# Altium PCB BCM_ECU_revA_V3.PcbDoc (part 6 of 7)
Units mm, origin at the board's own origin, x right, y up, seen from the top; angles counter-clockwise.
Board outline 109.5 x 156 mm, 4 copper layers (TOP SIG, GND, PWR, BOT SIG), stack 0.603 mm thick; 580 components, 446 nets, 1965 pads, 870 vias.
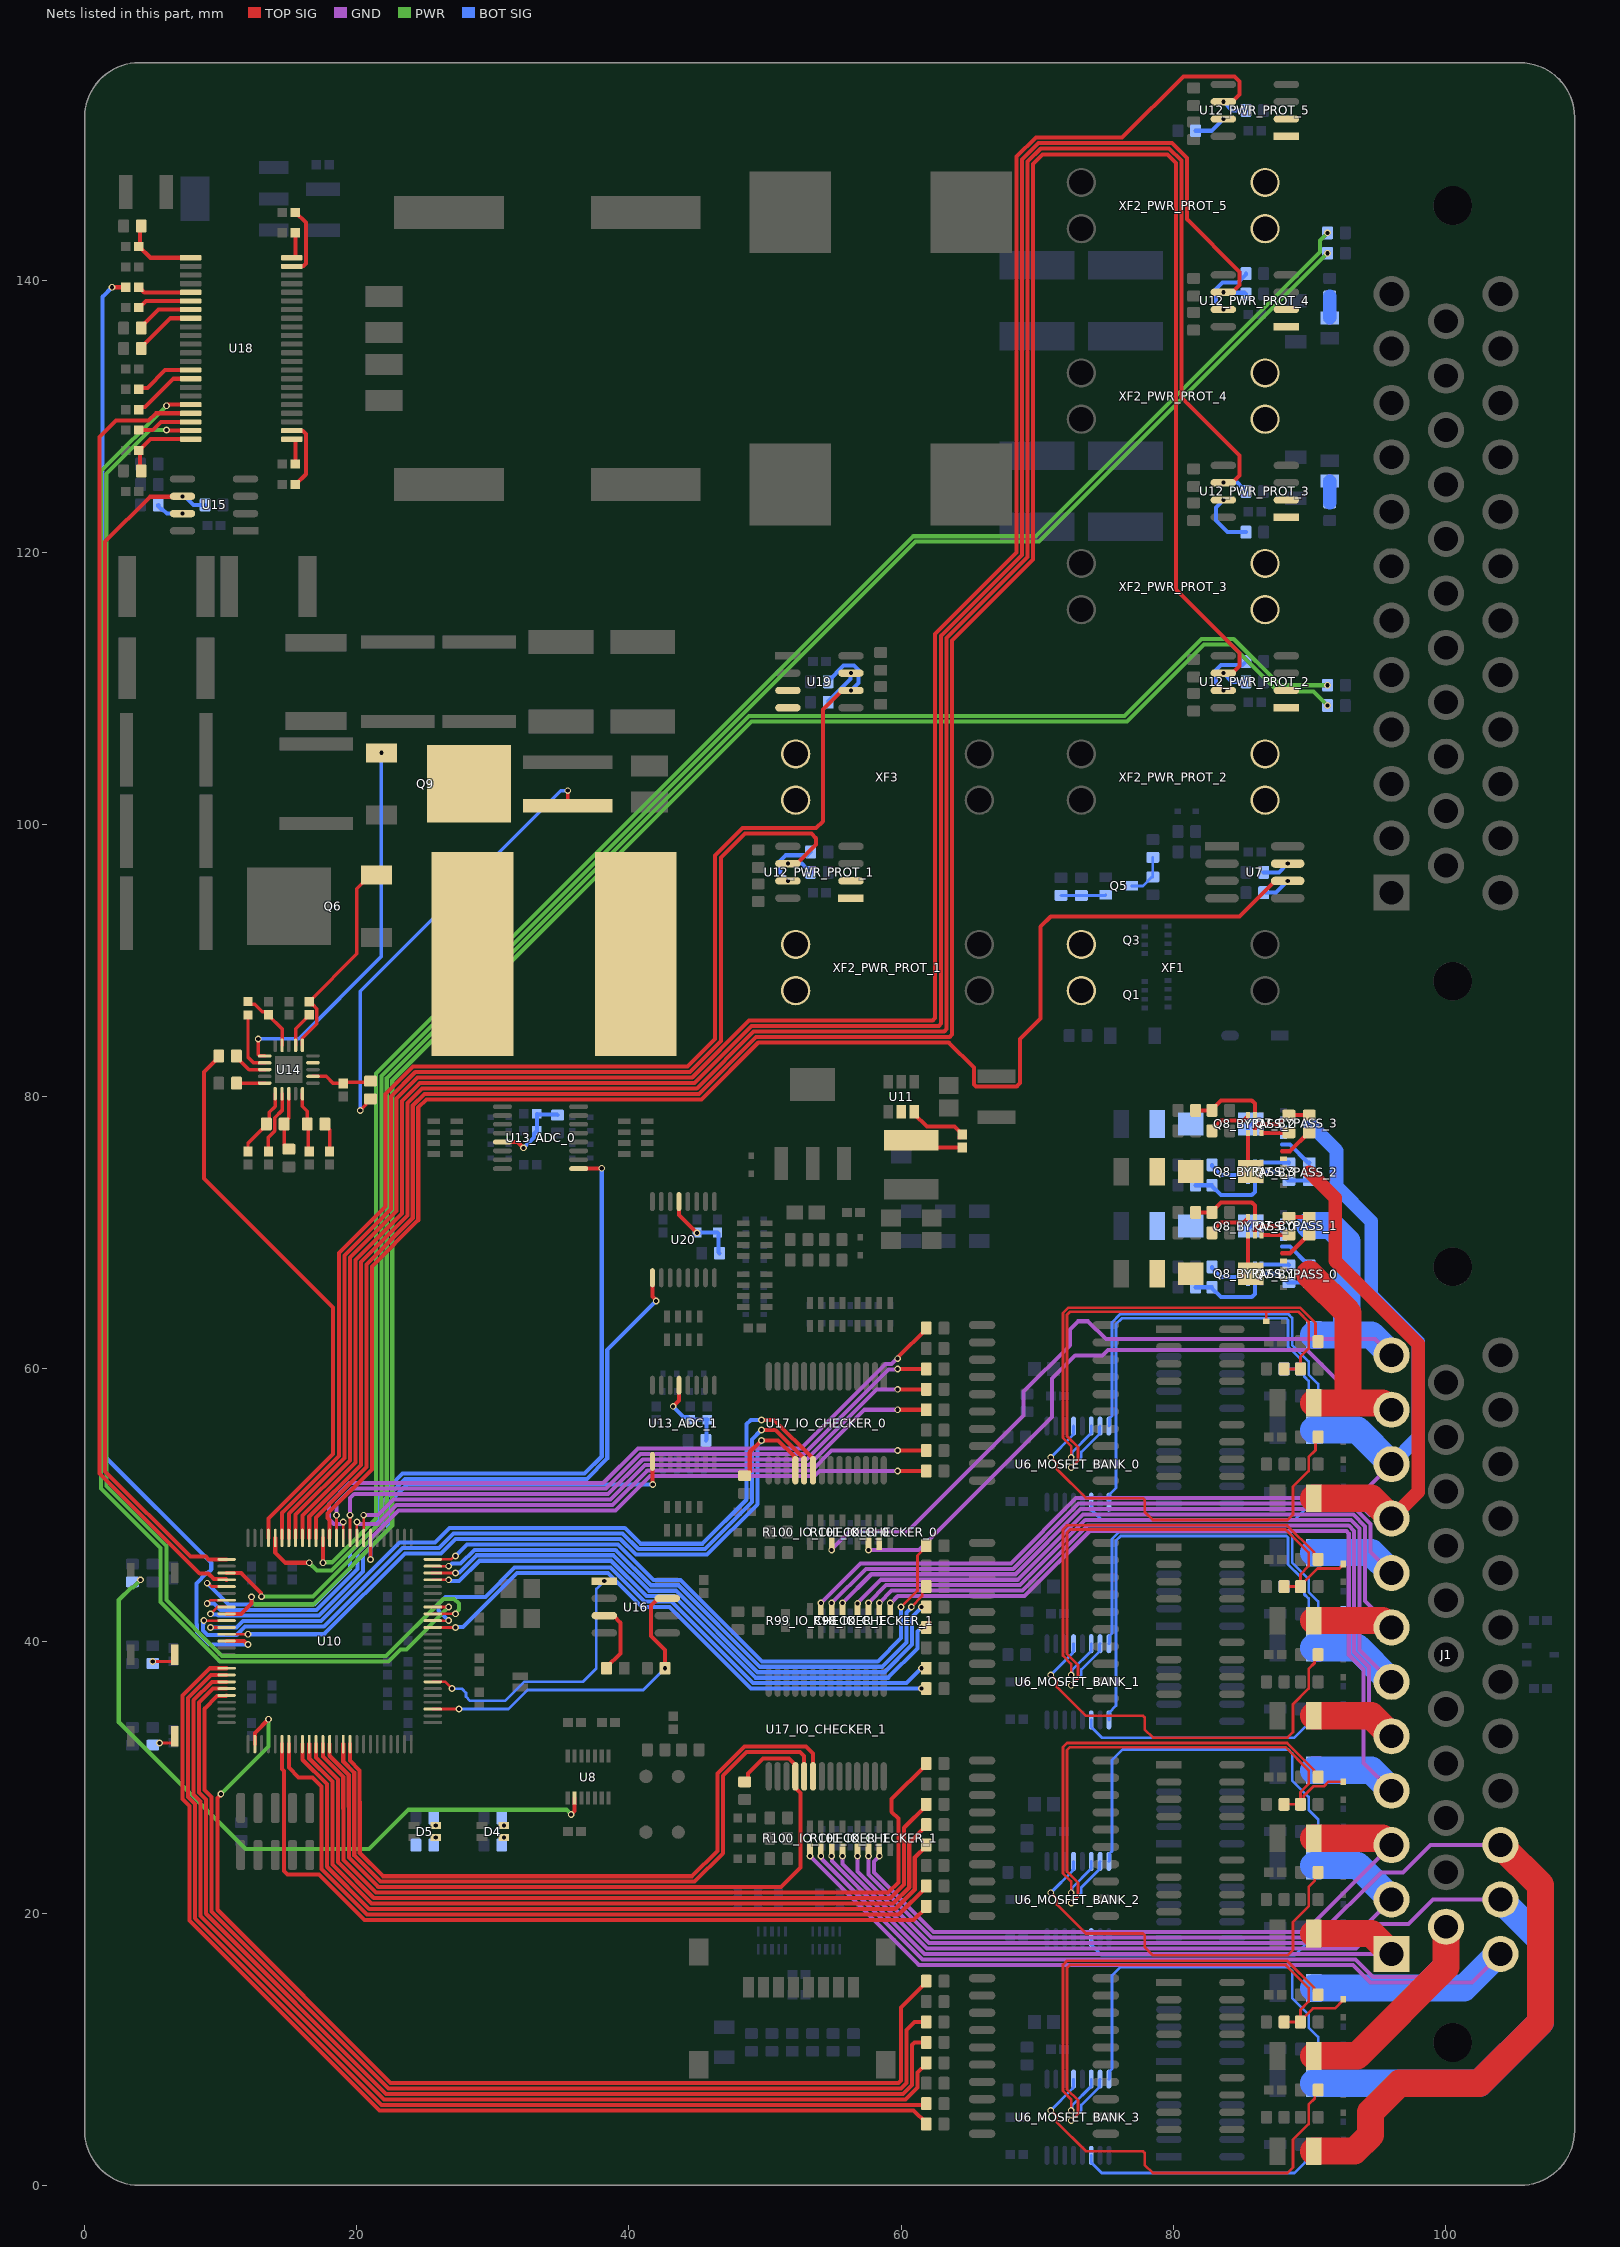
[diagram p7: the nets of this part, all layers, seen from the top]

## Via types
v1: diameter 0.5, hole 0.3, TOP SIG to BOT SIG, tented both sides, 797 vias
v2: diameter 1, hole 0.75, TOP SIG to BOT SIG, tented both sides, 56 vias
v3: diameter 4, hole 2.5, TOP SIG to BOT SIG, 9 vias
v4: diameter 0.75, hole 0.5, TOP SIG to BOT SIG, tented both sides, 6 vias
v5: diameter 2, hole 1.75, TOP SIG to BOT SIG, tented both sides, 2 vias

## Nets (pads, with @x,y where several pads share a name; then routed paths per layer and width w, separated by ;. In a path a pad name is that pad's centre, name@x,y a point inside that pad or via, vN(x,y) a via of type N, cw(c..) or ccw(c..) an arc to the next point about the centre after c; other vN are vias at no path point) (continued)
NetC42_1: C42.1 U11.6 | length 4.6
  TOP SIG w0.3: U11.6@60.95,78.901 60.95,78.751 61.899,77.802 63.927,77.802 64.292,77.436 64.314,77.436 64.5,77.25 C42.1@64.5,77.229 64.5,77.207 C42.1@64.314,77.021
NetC42_2: C42.2 L5.1 U11.5 | length 4
  TOP SIG w0.3: L5.1@60.8,76.75 L5.1@60.75,76.8 61.279,76.271 C42.2@64.5,76.271
NetC44_1: C44.1 U18.5 | length 4
  TOP SIG w0.3: C44.1@3.979,139.5 4,139.5 4.372,139.128 U18.5@7.78,139.128
NetC44_2: C44.2 U10.63 | length 109.8
  TOP SIG w0.3: v1(2,139.5) C44.2@3.021,139.5 ; U10.63@10.425,40 11.696,40 11.946,39.75 v1(12,39.75)
  BOT SIG w0.3: v1(2,139.5) 1.3,138.8 1.3,53.728 9.3,45.728 9.3,45.272 9.014,44.986 8.958,44.986 8.2,44.228 8.2,41.272 8.25,41.222 8.25,40.654 9.154,39.75 v1(12,39.75)
NetC45_1: C45.1 U18.44 | length 2.1
  TOP SIG w0.3: U18.44@15.22,141.668 15.439,141.668 15.479,141.708 C45.1@15.479,143.5
NetC50_ADC_0_1: C50_ADC_0.1 C51_ADC_0.1 R60_ADC_0.2 U13_ADC_0.13 | length 6.2
  TOP SIG w0.3: U13_ADC_0.13@30.7,76.675 31.825,76.675 v1(32.25,76.25)
  BOT SIG w0.3: v1(32.25,76.25) 33.021,77.021 33.021,77.314 33.207,77.5 C51_ADC_0.1@33.229,77.5 C50_ADC_0.1@33.229,78.75 33.279,78.7 34.7,78.7 R60_ADC_0.2@34.75,78.65
NetC50_ADC_1_1: C50_ADC_1.1 C51_ADC_1.1 R60_ADC_1.2 U13_ADC_1.13 | length 6.2
  TOP SIG w0.3: v1(43.25,57.25) 43.675,57.675 U13_ADC_1.13@43.675,58.8
  BOT SIG w0.3: v1(43.25,57.25) 44.021,56.479 44.314,56.479 44.5,56.293 C51_ADC_1.1@44.5,56.271 C50_ADC_1.1@45.75,56.271 45.7,56.221 45.7,54.8 R60_ADC_1.2@45.65,54.75
NetC52_2: C52.2 R86.2 U14.2 | length 4.5
  TOP SIG w0.254: U14.2@16.775,81.5 17.755,81.5 18.276,80.979 C52.2@19,80.979 19.086,81.064 20.914,81.064 R86.2@21,81.15
NetC63_1: C63.1 L3.2 Q6.3 Q9.4 U14.6 | length 15.5
  TOP SIG w0.254: U14.6@16,83.775 16,84.3 17.065,85.365 17.065,86.474 16.791,86.748 16.709,86.748 16.5,86.957 C63.1@16.5,86.979 16.5,87 20,90.5 20,95.295 20.991,96.286 Q6.3@21.435,96.286
NetC63_2: C63.2 U14.7 | length 2.7
  TOP SIG w0.254: U14.7@15.5,83.775 15.5,85 16.5,86 C63.2@16.5,86.021
NetC78_2: C78.2 R130.2 | length 1.6
  BOT SIG w1: C78.2@91.5,137.25 R130.2@91.5,138.85
NetC79_1: C79.1 U18.6 | length 4
  TOP SIG w0.3: C79.1@3.979,138 4,138 4.493,138.493 U18.6@7.78,138.493
NetC80_1: C80.1 U18.43 | length 5.2
  TOP SIG w0.3: U18.43@15.22,141.033 15.26,141.073 16.081,141.073 16.257,141.248 16.257,144.244 15.5,145 C80.1@15.479,145
NetC81_1: C81.1 U18.24 | length 5.2
  TOP SIG w0.3: U18.24@15.22,128.968 15.26,128.928 16.045,128.928 16.257,128.716 16.257,125.757 15.5,125 C81.1@15.479,125
NetC82_1: C82.1 U18.23 | length 2.1
  TOP SIG w0.3: U18.23@15.22,128.333 15.439,128.333 15.479,128.293 C82.1@15.479,126.5
NetC86_2: C86.2 R131.2 | length 1.6
  BOT SIG w1: R131.2@91.5,123.65 C86.2@91.5,125.25
NetC87_2: C87.2 U18.15 | length 4.7
  TOP SIG w0.3: C87.2@3.979,130.5 4.165,130.686 4.436,130.686 6.528,132.778 U18.15@7.78,132.778
NetC91_2: C91.2 R134.2 U18.1 | length 5.7
  TOP SIG w0.3: C91.2@3.979,142.5 4.064,142.586 4.064,143.914 R134.2@4.15,144 ; C91.2@4,142.5 4.833,141.668 U18.1@7.78,141.668
NetC95_2: C95.2 R135.2 U18.22 | length 5.7
  TOP SIG w0.3: C95.2@3.979,127.5 4.064,127.414 4.064,126.086 R135.2@4.15,126 ; C95.2@4,127.5 4.833,128.333 U18.22@7.78,128.333
NetC98_2: C98.2 U18.20 | length 4.1
  TOP SIG w0.3: C98.2@3.979,129 5,129 5.603,129.603 U18.20@7.78,129.603
NetC99_2: C99.2 U18.14 | length 4.4
  TOP SIG w0.3: C99.2@3.979,132 4.083,132.105 4.604,132.105 5.912,133.413 U18.14@7.78,133.413
NetC103_1: C103.1 R89.2 U14.9 | length 4.6
  TOP SIG w0.254: R89.2@12,87 12.19,86.81 12.49,86.81 13.048,86.252 13.291,86.252 13.5,86.043 C103.1@13.5,86.021 ; C103.1@13.5,86 14.5,85 U14.9@14.5,83.775
NetC105_1: C105.1 U14.17 | length 4.7
  TOP SIG w0.254: C105.1@13.5,75.979 13.5,77.01 13.979,77.489 13.979,78.468 14.5,78.99 U14.17@14.5,80.225
NetC106_1: C106.1 R90.1 U14.20 | length 4.5
  TOP SIG w0.254: U14.20@16,80.225 16,79.3 16.35,78.95 R90.1@16.35,78 16.425,77.925 16.425,76.054 C106.1@16.5,75.979
NetC107_1: C107.1 R90.2 | length 2.2
  TOP SIG w0.254: R90.2@17.65,78 17.65,77.925 18,77.575 C107.1@18,75.979
NetC108_1: C108.1 R92.1 U14.16 | length 5.1
  TOP SIG w0.254: C108.1@12,75.979 12,76.575 13.35,77.925 R92.1@13.35,78 13.568,78.218 13.568,78.856 14,79.288 U14.16@14,80.225
NetC115_1: C115.1 C116.1 R65.2 U20.13 | length 6.4
  TOP SIG w0.3: U20.13@43.675,72.8 43.675,71.325 v1(45,70)
  BOT SIG w0.3: C115.1@45,70.021 C116.1@46.5,70.021 46.575,69.946 46.575,68.575 R65.2@46.65,68.5
NetD4_1: D4.1 R43.2
  other v1: 30.8,26.45
NetD4_4: D4.4 R44.2
  other v1: 30.8,25.55
NetD5_1: D5.1 R45.2
  other v1: 25.8,26.45
NetD5_4: D5.4 R46.2
  other v1: 25.8,25.55
NetD7_BYPASS_0_1: D7_BYPASS_0.1 Q7_BYPASS_0.1 Q7_BYPASS_0.2 Q7_BYPASS_0.3 Q8_BYPASS_0.4 R54_BYPASS_0.1 | length 5.5
  TOP SIG w0.3: Q8_BYPASS_0.4@85.5,69.825 85.5,67.21 D7_BYPASS_0.1@85.71,67 ; 88,68.5 88.575,68.5 89.925,69.85 R54_BYPASS_0.1@90,69.85
NetD7_BYPASS_0_2: D7_BYPASS_0.2 F6_BYPASS_0.2
NetD7_BYPASS_1_1: D7_BYPASS_1.1 Q7_BYPASS_1.1 Q7_BYPASS_1.2 Q7_BYPASS_1.3 Q8_BYPASS_1.4 R54_BYPASS_1.1 | length 5.5
  BOT SIG w0.3: Q8_BYPASS_1.4@85.5,67.675 85.5,70.29 D7_BYPASS_1.1@85.71,70.5 ; 88,69 88.575,69 89.925,67.65 R54_BYPASS_1.1@90,67.65
NetD7_BYPASS_1_2: D7_BYPASS_1.2 F6_BYPASS_1.2
NetD7_BYPASS_2_1: D7_BYPASS_2.1 Q7_BYPASS_2.1 Q7_BYPASS_2.2 Q7_BYPASS_2.3 Q8_BYPASS_2.4 R54_BYPASS_2.1 | length 5.5
  TOP SIG w0.3: Q8_BYPASS_2.4@85.5,77.325 85.5,74.71 D7_BYPASS_2.1@85.71,74.5 ; 88,76 88.575,76 89.925,77.35 R54_BYPASS_2.1@90,77.35
NetD7_BYPASS_2_2: D7_BYPASS_2.2 F6_BYPASS_2.2
NetD7_BYPASS_3_1: D7_BYPASS_3.1 Q7_BYPASS_3.1 Q7_BYPASS_3.2 Q7_BYPASS_3.3 Q8_BYPASS_3.4 R54_BYPASS_3.1 | length 5.5
  BOT SIG w0.3: Q8_BYPASS_3.4@85.5,75.175 85.5,77.79 D7_BYPASS_3.1@85.71,78 ; 88,76.5 88.575,76.5 89.925,75.15 R54_BYPASS_3.1@90,75.15
NetD7_BYPASS_3_2: D7_BYPASS_3.2 F6_BYPASS_3.2
NetL3_1: L3.1 R85.2 R86.1 | length 32.4
  TOP SIG w0.254: v1(20.25,79) 20.652,79.402 20.652,79.577 20.925,79.85 R86.1@21,79.85 ; R85.2@35.5,101.4 v1(35.5,102.5)
  BOT SIG w0.254: v1(20.25,79) 20.25,87.75 35,102.5 v1(35.5,102.5)
NetQ1_5-6-7-8: Q1.5-6-7-8 Q3.5-6-7-8 XF1.3 XF1.4
NetQ5_1: Q5.1 R30.2 R32.2 | length 3.3
  BOT SIG w0.2: R30.2@71.75,94.8 R32.2@73.25,94.8 75,94.8 Q5.1@75.05,94.85
NetQ5_3: Q5.3 R28.1 R69.1 | length 3.3
  BOT SIG w0.2: Q5.3@76.95,95.5 77.775,95.5 78.425,96.15 R28.1@78.5,96.15 R69.1@78.5,97.6
NetQ8_BYPASS_0_2: Q8_BYPASS_0.2 R58_BYPASS_0.1 R59_BYPASS_0.2 | length 5.6
  TOP SIG w0.3: R59_BYPASS_0.2@81.65,71.5 R58_BYPASS_0.1@82.85,71.5 82.85,71.575 83.502,72.227 85.773,72.227 86,72 Q8_BYPASS_0.2@86,71.175
NetQ8_BYPASS_0_3: Q8_BYPASS_0.3 R56_BYPASS_0.1 | length 3.2
  TOP SIG w0.3: R56_BYPASS_0.1@82.85,70 82.85,70.075 83.524,70.749 85.149,70.749 85.5,71.1 Q8_BYPASS_0.3@85.5,71.175
NetQ8_BYPASS_0_5: Q8_BYPASS_0.5 R54_BYPASS_0.2 R55_BYPASS_0.1 | length 4.8
  TOP SIG w0.3: Q8_BYPASS_0.5@86,69.825 86,70.324 86.176,70.5 87.775,70.5 88.175,70.9 R55_BYPASS_0.1@88.425,71.15 ; R55_BYPASS_0.1@88.5,71.15 R54_BYPASS_0.2@90,71.15
NetQ8_BYPASS_1_2: Q8_BYPASS_1.2 R58_BYPASS_1.1 R59_BYPASS_1.2 | length 5.6
  BOT SIG w0.3: R59_BYPASS_1.2@81.65,66 R58_BYPASS_1.1@82.85,66 82.85,65.925 83.502,65.274 85.773,65.274 86,65.5 Q8_BYPASS_1.2@86,66.325
NetQ8_BYPASS_1_3: Q8_BYPASS_1.3 R56_BYPASS_1.1 | length 3.2
  BOT SIG w0.3: R56_BYPASS_1.1@82.85,67.5 82.85,67.425 83.524,66.751 85.149,66.751 85.5,66.4 Q8_BYPASS_1.3@85.5,66.325
NetQ8_BYPASS_1_5: Q8_BYPASS_1.5 R54_BYPASS_1.2 R55_BYPASS_1.1 | length 4.8
  BOT SIG w0.3: Q8_BYPASS_1.5@86,67.675 86,67.176 86.176,67 87.775,67 88.175,66.6 R55_BYPASS_1.1@88.425,66.35 ; R55_BYPASS_1.1@88.5,66.35 R54_BYPASS_1.2@90,66.35
NetQ8_BYPASS_2_2: Q8_BYPASS_2.2 R58_BYPASS_2.1 R59_BYPASS_2.2 | length 5.6
  TOP SIG w0.3: R59_BYPASS_2.2@81.65,79 R58_BYPASS_2.1@82.85,79 82.85,79.075 83.502,79.727 85.773,79.727 86,79.5 Q8_BYPASS_2.2@86,78.675
NetQ8_BYPASS_2_3: Q8_BYPASS_2.3 R56_BYPASS_2.1 | length 3.2
  TOP SIG w0.3: R56_BYPASS_2.1@82.85,77.5 82.85,77.575 83.524,78.249 85.149,78.249 85.5,78.6 Q8_BYPASS_2.3@85.5,78.675
NetQ8_BYPASS_2_5: Q8_BYPASS_2.5 R54_BYPASS_2.2 R55_BYPASS_2.1 | length 4.8
  TOP SIG w0.3: Q8_BYPASS_2.5@86,77.325 86,77.824 86.176,78 87.775,78 88.175,78.4 R55_BYPASS_2.1@88.425,78.65 ; R55_BYPASS_2.1@88.5,78.65 R54_BYPASS_2.2@90,78.65
NetQ8_BYPASS_3_2: Q8_BYPASS_3.2 R58_BYPASS_3.1 R59_BYPASS_3.2 | length 5.6
  BOT SIG w0.3: R59_BYPASS_3.2@81.65,73.5 R58_BYPASS_3.1@82.85,73.5 82.85,73.425 83.502,72.774 85.773,72.774 86,73 Q8_BYPASS_3.2@86,73.825
NetQ8_BYPASS_3_3: Q8_BYPASS_3.3 R56_BYPASS_3.1 | length 3.2
  BOT SIG w0.3: R56_BYPASS_3.1@82.85,75 82.85,74.925 83.524,74.251 85.149,74.251 85.5,73.9 Q8_BYPASS_3.3@85.5,73.825
NetQ8_BYPASS_3_5: Q8_BYPASS_3.5 R54_BYPASS_3.2 R55_BYPASS_3.1 | length 4.8
  BOT SIG w0.3: Q8_BYPASS_3.5@86,75.175 86,74.676 86.176,74.5 87.775,74.5 88.175,74.1 R55_BYPASS_3.1@88.425,73.85 ; R55_BYPASS_3.1@88.5,73.85 R54_BYPASS_3.2@90,73.85
NetQ9_1: Q9.1 U14.11 | length 28.2
  TOP SIG w0.254: v1(12.75,84.25) 12.75,83.104 12.854,83 U14.11@13.225,83
  BOT SIG w0.254: v1(12.75,84.25) 15.744,84.25 21.809,90.315 v1(21.809,105.286)
NetR1_MOSFET_BANK_0_1: R1_MOSFET_BANK_0.1 U10.36 | length 52.9
  TOP SIG w0.2: U10.36@19,47.575 v1(19,48.75)
  TOP SIG w0.3: v1(59.75,60.75) 59.788,60.788 59.788,60.863 61.85,62.925 R1_MOSFET_BANK_0.1@61.85,63
  GND w0.3: v1(19,48.75) 18.946,48.75 18.796,48.6 18.3,48.6 17.95,48.95 17.95,50.086 19.474,51.61 38.11,51.61 40.652,54.152 52.652,54.152 58.863,60.363 59.309,60.363 59.696,60.75 v1(59.75,60.75)
NetR1_MOSFET_BANK_1_1: R1_MOSFET_BANK_1.1 U10.25 | length 46.7
  TOP SIG w0.2: U10.25@25.576,46 26.919,46 27.169,46.25 v1(27.25,46.25) ; v1(60,42.5) 61.2,43.7 61.2,46.275 61.85,46.925 R1_MOSFET_BANK_1.1@61.85,47
  BOT SIG w0.3: v1(27.25,46.25) 28.105,47.105 39.191,47.105 41.796,44.5 43.8,44.5 49.792,38.508 58.286,38.508 59.995,40.218 59.995,42.495 v1(60,42.5)
NetR1_MOSFET_BANK_2_1: R1_MOSFET_BANK_2.1 U10.87 | length 61.2
  TOP SIG w0.3: U10.87@17.5,32.425 17.5,31.5 19.002,29.998 19.002,27.67 19.006,27.665 19.006,23.908 21.407,21.508 59.04,21.508 59.798,22.266 59.798,26.952 59.3,27.45 59.3,28.375 61.85,30.925 R1_MOSFET_BANK_2.1@61.85,31
NetR1_MOSFET_BANK_3_1: R1_MOSFET_BANK_3.1 U10.77 | length 81.5
  TOP SIG w0.3: v1(10,28.75) 10,28.724 9.75,28.474 9.75,20.25 22.487,7.513 59.813,7.513 59.994,7.694 59.994,8.52 60,8.526 60,13.075 61.85,14.925 R1_MOSFET_BANK_3.1@61.85,15 ; U10.77@12.5,32.425 12.5,33.25 v1(13.5,34.25)
  PWR w0.3: v1(10,28.75) 13.5,32.25 v1(13.5,34.25)
NetR2_MOSFET_BANK_0_1: R2_MOSFET_BANK_0.1 U10.35 | length 48.6
  TOP SIG w0.2: U10.35@19.5,47.575 19.5,48.543 v1(19.5,49.25)
  TOP SIG w0.3: v1(59.75,58.5) R2_MOSFET_BANK_0.1@61.85,58.5
  GND w0.3: v1(19.5,49.25) 19.5,50.5 19.806,50.806 38.471,50.806 41.013,53.348 53.048,53.348 58.2,58.5 v1(59.75,58.5)
NetR2_MOSFET_BANK_1_1: R2_MOSFET_BANK_1.1 U10.23 | length 43.3
  TOP SIG w0.2: U10.23@25.5,45 U10.23@25.576,45 v1(27.25,45)
  BOT SIG w0.3: v1(27.25,45) 27.288,45.038 27.538,45.038 28.802,46.302 38.859,46.302 41.463,43.697 43.467,43.697 49.459,37.705 58.773,37.705 60.798,39.73 60.798,41.771 61.5,42.472 v1(61.5,42.5)
NetR2_MOSFET_BANK_2_1: R2_MOSFET_BANK_2.1 U10.85 | length 58.8
  TOP SIG w0.3: U10.85@16.5,32.425 16.5,31.364 18.198,29.666 18.198,27.337 18.203,27.333 18.203,26.501 18.203,25.571 18.203,24.571 18.203,23.576 21.074,20.705 22.07,20.705 23.07,20.705 23.999,20.705 59.405,20.705 60.602,21.902 60.602,25.177 61.85,26.425 R2_MOSFET_BANK_2.1@61.85,26.5
NetR2_MOSFET_BANK_3_1: R2_MOSFET_BANK_3.1 U10.70 | length 79.9
  TOP SIG w0.3: U10.70@10.425,36.5 9.414,36.5 8.397,35.483 8.397,28.878 8.91,28.365 8.91,19.955 22.155,6.71 60.145,6.71 60.797,7.361 60.797,8.187 60.803,8.193 60.803,10.324 60.979,10.5 R2_MOSFET_BANK_3.1@61.85,10.5
NetR3_MOSFET_BANK_0_1: R3_MOSFET_BANK_0.1 U10.33 | length 46.2
  TOP SIG w0.2: U10.33@20.5,47.575 v1(20.5,49.25)
  TOP SIG w0.3: v1(59.75,57) R3_MOSFET_BANK_0.1@61.85,57
  GND w0.3: v1(20.5,49.25) 21.55,49.25 22.705,50.405 38.637,50.405 41.179,52.947 53.247,52.947 57.3,57 v1(59.75,57)
NetR3_MOSFET_BANK_1_1: R3_MOSFET_BANK_1.1 U10.22 | length 42.4
  TOP SIG w0.2: U10.22@25.576,44.5 v1(26.75,44.5)
  BOT SIG w0.3: v1(26.75,44.5) 26.804,44.5 26.904,44.4 27.5,44.4 29,45.9 38.692,45.9 41.297,43.295 43.301,43.295 49.293,37.303 59.053,37.303 61.2,39.45 61.2,40.7 v1(61.5,41)
NetR3_MOSFET_BANK_2_1: R3_MOSFET_BANK_2.1 U10.84 | length 58.5
  TOP SIG w0.3: U10.84@16,32.425 16,31.275 17.797,29.478 17.797,27.171 17.802,27.166 17.802,26.334 17.802,25.405 17.802,24.405 17.802,23.409 20.908,20.303 21.903,20.303 22.903,20.303 23.833,20.303 59.571,20.303 61.003,21.735 61.003,24.078 61.85,24.925 R3_MOSFET_BANK_2.1@61.85,25
NetR3_MOSFET_BANK_3_1: R3_MOSFET_BANK_3.1 U10.69 | length 79.8
  TOP SIG w0.3: U10.69@10.425,37 9.346,37 7.995,35.649 7.995,28.712 8.508,28.199 8.508,19.788 21.988,6.308 60.312,6.308 61.198,7.195 61.198,8.021 61.205,8.027 61.205,8.28 61.85,8.925 R3_MOSFET_BANK_3.1@61.85,9
NetR4_MOSFET_BANK_0_1: R4_MOSFET_BANK_0.1 U10.32 | length 46
  TOP SIG w0.2: v1(21,46) U10.32@21,47.575
  TOP SIG w0.3: v1(59.75,52.5) R4_MOSFET_BANK_0.1@61.85,52.5
  GND w0.3: v1(21,46) 21,47.528 23.074,49.602 39.002,49.602 41.544,52.144 53.644,52.144 54,52.5 v1(59.75,52.5)
NetR4_MOSFET_BANK_1_1: R4_MOSFET_BANK_1.1 U10.15 | length 41.1
  TOP SIG w0.2: U10.15@25.576,41 v1(27.25,41)
  BOT SIG w0.3: v1(27.25,41) 27.288,41.038 27.806,41.038 31.755,44.987 38.469,44.987 40.964,42.492 42.968,42.492 48.962,36.498 60.566,36.498 60.568,36.5 v1(61.5,36.5)
NetR4_MOSFET_BANK_2_1: R4_MOSFET_BANK_2.1 U10.81 | length 58.5
  TOP SIG w0.3: U10.81@14.5,32.425 14.5,30.6 14.65,30.45 14.65,23.1 14.9,22.85 17.225,22.85 20.575,19.5 60.925,19.5 61.85,20.425 R4_MOSFET_BANK_2.1@61.85,20.5
NetR4_MOSFET_BANK_3_1: R4_MOSFET_BANK_3.1 U10.67 | length 81.2
  TOP SIG w0.3: U10.67@10.425,38 9.21,38 7.192,35.982 7.192,28.379 7.705,27.866 7.705,19.455 21.655,5.505 60.92,5.505 61.85,4.575 R4_MOSFET_BANK_3.1@61.85,4.5
NetR5_MOSFET_BANK_0_1: R5_MOSFET_BANK_0.1 U10.37 | length 50
  TOP SIG w0.2: U10.37@18.5,47.575 18.5,48.543 18.5,49.24 v1(18.505,49.245)
  TOP SIG w0.3: v1(59.75,60) R5_MOSFET_BANK_0.1@61.85,60
  GND w0.3: v1(18.505,49.245) 18.505,50.073 19.64,51.208 38.304,51.208 40.846,53.75 52.85,53.75 59.062,59.962 59.712,59.962 v1(59.75,60)
NetR5_MOSFET_BANK_1_1: R5_MOSFET_BANK_1.1 U10.24 | length 44.3
  TOP SIG w0.2: U10.24@25.576,45.5 v1(26.75,45.5) ; v1(60.75,42.5) 60.75,42.507 61.55,43.307 61.55,43.7 R5_MOSFET_BANK_1.1@61.85,44
  BOT SIG w0.3: v1(26.75,45.5) 26.804,45.5 27.004,45.7 27.632,45.7 28.635,46.703 39.025,46.703 41.63,44.098 43.634,44.098 49.626,38.106 58.606,38.106 60.397,39.897 60.397,42.093 60.75,42.446 v1(60.75,42.5)
NetR5_MOSFET_BANK_2_1: R5_MOSFET_BANK_2.1 U10.86 | length 59
  TOP SIG w0.3: U10.86@17,32.425 17,31.432 18.6,29.832 18.6,27.504 18.605,27.499 18.605,26.667 18.605,25.738 18.605,24.738 18.605,23.742 21.24,21.106 22.236,21.106 23.236,21.106 24.165,21.106 59.206,21.106 60.2,22.1 60.2,26.275 61.85,27.925 R5_MOSFET_BANK_2.1@61.85,28
NetR5_MOSFET_BANK_3_1: R5_MOSFET_BANK_3.1 U10.71 | length 79.4
  TOP SIG w0.3: U10.71@10.425,36 10.381,35.956 9.736,35.956 8.798,35.019 8.798,29.044 9.311,28.531 9.311,20.121 22.321,7.111 59.979,7.111 60.395,7.527 60.395,8.353 60.402,8.36 60.402,11.402 61,12 R5_MOSFET_BANK_3.1@61.85,12
NetR6_MOSFET_BANK_0_1: R6_MOSFET_BANK_0.1 U10.34 | length 45.3
  TOP SIG w0.2: U10.34@20,47.575 v1(20,48.75)
  TOP SIG w0.3: v1(59.75,54) R6_MOSFET_BANK_0.1@61.85,54
  GND w0.3: v1(20,48.75) 20.054,48.75 20.204,48.6 21.5,48.6 22.903,50.003 38.803,50.003 41.345,52.545 53.445,52.545 54.9,54 v1(59.75,54)
NetR6_MOSFET_BANK_1_1: R6_MOSFET_BANK_1.1 U10.16 | length 43.4
  TOP SIG w0.2: U10.16@25.5,41.5 U10.16@25.576,41.5 v1(26.75,41.5)
  BOT SIG w0.3: v1(26.75,41.5) 26,42.25 26,42.75 26.5,43.25 29.45,43.25 31.589,45.389 38.636,45.389 41.131,42.894 43.135,42.894 49.128,36.9 60.4,36.9 v1(61.5,38)
NetR6_MOSFET_BANK_2_1: R6_MOSFET_BANK_2.1 U10.82 | length 57.5
  TOP SIG w0.3: U10.82@15,32.425 15,30.7 15.725,29.975 16.732,29.975 17.395,29.312 17.395,27.005 17.4,27 17.4,26.168 17.4,25.238 17.4,24.238 17.4,23.243 20.741,19.902 21.737,19.902 22.737,19.902 23.666,19.902 59.827,19.902 61.85,21.925 R6_MOSFET_BANK_2.1@61.85,22
NetR6_MOSFET_BANK_3_1: R6_MOSFET_BANK_3.1 U10.68 | length 79.4
  TOP SIG w0.3: U10.68@10.425,37.5 9.278,37.5 7.594,35.815 7.594,28.545 8.106,28.032 8.106,19.622 21.822,5.906 61.756,5.906 R6_MOSFET_BANK_3.1@61.85,6
NetR9_2: R9.2 U10.59 | length 132.4
  TOP SIG w0.3: U10.59@10.425,42 11.5,42 12.25,42.75 v1(12.25,43.25)
  PWR w0.3: v1(12.25,43.25) 12.288,43.212 12.288,42.876 12.464,42.7 16.8,42.7 22.6,48.5 22.6,81.2 48.998,107.598 76.598,107.598 82.25,113.25 84.25,113.25 87.7,109.8 90.3,109.8 v1(91.35,108.75)
NetR10_2: R10.2 U10.53 | length 131.5
  TOP SIG w0.3: U10.53@10.425,45 11.5,45 12.962,43.538 12.962,43.296 v1(13,43.258)
  PWR w0.3: v1(13,43.258) 16.79,43.258 22.198,48.666 22.198,81.366 48.832,108 76.432,108 82.084,113.652 84.448,113.652 87.85,110.25 v1(91.35,110.25)
NetR13_MOSFET_BANK_0_1: R13_MOSFET_BANK_0.1 U6_MOSFET_BANK_0.11 | length 18.6
  BOT SIG w0.2: U6_MOSFET_BANK_0.11@73.975,50.2 73.975,49.675 74.75,48.9 88.9,48.9 90.35,50.35 90.35,50.7 R13_MOSFET_BANK_0.1@90.65,51
NetR13_MOSFET_BANK_1_1: R13_MOSFET_BANK_1.1 U6_MOSFET_BANK_1.11 | length 18.6
  BOT SIG w0.2: U6_MOSFET_BANK_1.11@73.975,34.2 73.975,33.675 74.75,32.9 88.9,32.9 90.35,34.35 90.35,34.7 R13_MOSFET_BANK_1.1@90.65,35
NetR13_MOSFET_BANK_2_1: R13_MOSFET_BANK_2.1 U6_MOSFET_BANK_2.11 | length 18.6
  BOT SIG w0.2: U6_MOSFET_BANK_2.11@73.975,18.2 73.975,17.675 74.75,16.9 88.9,16.9 90.35,18.35 90.35,18.7 R13_MOSFET_BANK_2.1@90.65,19
NetR13_MOSFET_BANK_3_1: R13_MOSFET_BANK_3.1 U6_MOSFET_BANK_3.11 | length 18.6
  BOT SIG w0.2: U6_MOSFET_BANK_3.11@73.975,2.2 73.975,1.675 74.75,0.9 88.9,0.9 90.35,2.35 90.35,2.7 R13_MOSFET_BANK_3.1@90.65,3
NetR14_MOSFET_BANK_0_1: R14_MOSFET_BANK_0.1 U6_MOSFET_BANK_0.4 | length 30.1
  TOP SIG w0.2: v1(71,53.5) 71.448,53.052 71.448,52.625 73.575,50.499 77.781,50.499 77.898,50.381 77.898,49.502 78.5,48.9 88.4,48.9 88.802,49.302 88.802,51.35 89.952,52.5 89.952,53.525 90.45,54.023 90.45,54.8 R14_MOSFET_BANK_0.1@90.65,55
  BOT SIG w0.2: v1(71,53.5) 72.6,55.1 72.6,55.16 72.675,55.235 U6_MOSFET_BANK_0.4@72.675,55.8
NetR14_MOSFET_BANK_1_1: R14_MOSFET_BANK_1.1 U6_MOSFET_BANK_1.4 | length 30.1
  TOP SIG w0.2: v1(71,37.5) 71.448,37.052 71.448,36.625 73.575,34.499 77.781,34.499 77.898,34.381 77.898,33.502 78.5,32.9 88.4,32.9 88.802,33.302 88.802,35.35 89.952,36.5 89.952,37.952 90.405,38.405 90.405,38.755 R14_MOSFET_BANK_1.1@90.65,39
  BOT SIG w0.2: v1(71,37.5) 72.6,39.1 72.6,39.16 72.675,39.235 U6_MOSFET_BANK_1.4@72.675,39.8
NetR14_MOSFET_BANK_2_1: R14_MOSFET_BANK_2.1 U6_MOSFET_BANK_2.4 | length 30.1
  TOP SIG w0.2: v1(71,21.5) 71.448,21.052 71.448,20.625 73.575,18.499 77.781,18.499 77.898,18.381 77.898,17.502 78.5,16.9 88.4,16.9 88.802,17.302 88.802,19.35 89.952,20.5 89.952,21.936 90.413,22.397 90.413,22.763 R14_MOSFET_BANK_2.1@90.65,23
  BOT SIG w0.2: v1(71,21.5) 72.6,23.1 72.6,23.16 72.675,23.235 U6_MOSFET_BANK_2.4@72.675,23.8
NetR14_MOSFET_BANK_3_1: R14_MOSFET_BANK_3.1 U6_MOSFET_BANK_3.4 | length 30.1
  TOP SIG w0.2: v1(71,5.5) 71.448,5.052 71.448,4.625 73.575,2.499 77.781,2.499 77.898,2.381 77.898,1.502 78.5,0.9 88.4,0.9 88.802,1.302 88.802,3.35 89.952,4.5 89.952,5.936 90.413,6.397 90.413,6.763 R14_MOSFET_BANK_3.1@90.65,7
  BOT SIG w0.2: v1(71,5.5) 72.6,7.1 72.6,7.16 72.675,7.235 U6_MOSFET_BANK_3.4@72.675,7.8
NetR15_MOSFET_BANK_0_1: R15_MOSFET_BANK_0.1 U6_MOSFET_BANK_0.8 | length 27.9
  BOT SIG w0.2: U6_MOSFET_BANK_0.8@75.275,55.8 75.324,55.849 75.324,56.374 75.5,56.55 75.5,60.5 75.5,61.177 75.5,63.427 76.093,64.019 78.343,64.019 79.019,64.019 88.466,64.019 88.741,63.744 88.741,61.759 89.952,60.549 89.952,59.597 90.65,58.899 R15_MOSFET_BANK_0.1@90.65,58
NetR15_MOSFET_BANK_1_1: R15_MOSFET_BANK_1.1 U6_MOSFET_BANK_1.8 | length 27.9
  BOT SIG w0.2: U6_MOSFET_BANK_1.8@75.275,39.8 75.324,39.849 75.324,40.374 75.5,40.55 75.5,47.5 76.019,48.019 88.466,48.019 88.741,47.744 88.741,45.759 89.952,44.549 89.952,43.597 90.65,42.899 R15_MOSFET_BANK_1.1@90.65,42
NetR15_MOSFET_BANK_2_1: R15_MOSFET_BANK_2.1 U6_MOSFET_BANK_2.8 | length 27.8
  BOT SIG w0.2: U6_MOSFET_BANK_2.8@75.275,23.8 75.324,23.849 75.324,24.374 75.5,24.55 75.5,31.25 76.269,32.019 88.466,32.019 88.741,31.744 88.741,29.759 89.952,28.549 89.952,27.597 90.65,26.899 R15_MOSFET_BANK_2.1@90.65,26
NetR15_MOSFET_BANK_3_1: R15_MOSFET_BANK_3.1 U6_MOSFET_BANK_3.8 | length 27.9
  BOT SIG w0.2: U6_MOSFET_BANK_3.8@75.275,7.8 75.324,7.849 75.324,8.374 75.5,8.55 75.5,15.25 75.5,15.427 76.093,16.019 76.269,16.019 88.466,16.019 88.741,15.744 88.741,13.759 89.952,12.549 89.952,11.597 90.65,10.899 R15_MOSFET_BANK_3.1@90.65,10
NetR17_MOSFET_BANK_0_1: R17_MOSFET_BANK_0.1 U6_MOSFET_BANK_0.6 | length 34.4
  TOP SIG w0.2: v1(72.5,53.5) 72.5,54.324 71.9,54.924 71.9,64.106 72.294,64.5 89.326,64.5 90.45,63.377 90.45,62.2 R17_MOSFET_BANK_0.1@90.65,62
  BOT SIG w0.2: v1(72.5,53.5) 72.557,53.558 72.557,53.858 73.975,55.275 U6_MOSFET_BANK_0.6@73.975,55.8
NetR17_MOSFET_BANK_1_1: R17_MOSFET_BANK_1.1 U6_MOSFET_BANK_1.6 | length 33.9
  TOP SIG w0.2: v1(72.5,37.5) 72.5,38.324 71.9,38.924 71.9,48.2 72.2,48.5 88.378,48.5 90.35,46.528 90.35,46.3 R17_MOSFET_BANK_1.1@90.65,46
  BOT SIG w0.2: v1(72.5,37.5) 72.557,37.558 72.557,37.858 73.975,39.275 U6_MOSFET_BANK_1.6@73.975,39.8
NetR17_MOSFET_BANK_2_1: R17_MOSFET_BANK_2.1 U6_MOSFET_BANK_2.6 | length 33.9
  TOP SIG w0.2: v1(72.5,21.5) 72.5,22.324 71.9,22.924 71.9,32.2 72.2,32.5 88.378,32.5 90.35,30.528 90.35,30.3 R17_MOSFET_BANK_2.1@90.65,30
  BOT SIG w0.2: v1(72.5,21.5) 72.557,21.558 72.557,21.858 73.975,23.275 U6_MOSFET_BANK_2.6@73.975,23.8
NetR17_MOSFET_BANK_3_1: R17_MOSFET_BANK_3.1 U6_MOSFET_BANK_3.6 | length 33.9
  TOP SIG w0.2: v1(72.5,5.5) 72.5,6.324 71.9,6.924 71.9,16.2 72.2,16.5 88.378,16.5 90.35,14.528 90.35,14.3 R17_MOSFET_BANK_3.1@90.65,14
  BOT SIG w0.2: v1(72.5,5.5) 72.557,5.558 72.557,5.858 73.975,7.275 U6_MOSFET_BANK_3.6@73.975,7.8
NetR26_1: R26.1 U7.6 U10.38 | length 116.7
  TOP SIG w0.3: U10.38@18,47.575 18,48.9 17.85,49.05 17.85,49.367 21.099,52.616 21.099,67.516 24.51,70.928 24.51,79.202 25.123,79.815 45.315,79.815 49.5,84 63.5,84 65.351,82.149 65.351,80.899 65.502,80.748 68.498,80.748 68.75,81 68.75,84.25 70.25,85.75 70.25,92.5 71,93.25 84.875,93.25 87.49,95.865 v1(88.416,95.865)
  BOT SIG w0.3: R26.1@86.65,95 87.551,95 v1(88.416,95.865)
NetR34_1: R34.1 U8.9 | length 51
  TOP SIG w0.3: v1(35.75,27.25) 35.75,27.268 36,27.518 U8.9@36,28.457
  PWR w0.3: v1(4.1,44.5) 3.549,43.949 3.449,43.949 2.5,43 2.5,34.032 11.832,24.7 20.9,24.7 23.8,27.6 35.4,27.6 v1(35.75,27.25)
NetR36_1: R36.1 U10.3 U16.7 | length 24.8
  TOP SIG w0.2: U10.3@25.576,35 v1(27.5,35)
  TOP SIG w0.3: v1(42.65,38) 42.65,39.355 41.627,40.378 41.627,42.611 42.151,43.135 U16.7@42.816,43.135
  BOT SIG w0.2: v1(27.5,35) 27.502,34.998 31.147,34.998 32.545,36.397 41.047,36.397 v1(42.65,38)
NetR39_2: R39.2 SW2.1 | length 2
  TOP SIG w0.2: v1(5,38.5) 6.45,38.5 6.5,38.55 SW2.1@6.5,39
NetR40_2: R40.2 SW3.1 | length 1.5
  TOP SIG w0.2: v1(5.5,32.5) 6.45,32.5 6.625,32.675 SW3.1@6.625,33
NetR50_PWR_PROT_1_2: R50_PWR_PROT_1.2 U10.44 U12_PWR_PROT_1.6 | length 87.9
  TOP SIG w0.3: U10.44@15,47.575 15,49.357 19.091,53.448 19.091,68.348 22.502,71.759 22.502,80.034 24.291,81.823 44.473,81.823 46.75,84.1 46.75,97.582 48.518,99.35 53.4,99.35 53.75,99 53.75,98.535 52.35,97.135 v1(51.684,97.135)
  BOT SIG w0.3: v1(51.684,97.135) 52.715,97.135 53.025,96.825 53.1,96.825 53.35,96.575 R50_PWR_PROT_1.2@53.35,96.5
NetR50_PWR_PROT_2_2: R50_PWR_PROT_2.2 U10.40 U12_PWR_PROT_2.6 | length 196.3
  TOP SIG w0.3: U10.40@17,47.575 17,49.085 20.697,52.782 20.697,67.683 24.108,71.094 24.108,79.368 24.957,80.217 45.149,80.217 49.334,84.402 63.574,84.402 63.75,84.577 63.75,113.55 69.7,119.5 69.7,148.564 70.386,149.25 79.584,149.25 80.197,148.637 80.197,117.297 84.873,112.622 84.873,111.658 84.35,111.135 v1(83.684,111.135)
  BOT SIG w0.3: v1(83.684,111.135) 84.319,110.5 R50_PWR_PROT_2.2@85.35,110.5
NetR50_PWR_PROT_3_2: R50_PWR_PROT_3.2 U10.41 U12_PWR_PROT_3.6 | length 183.4
  TOP SIG w0.3: U10.41@16.5,47.575 16.5,49.153 20.295,52.949 20.295,67.849 23.706,71.26 23.706,79.535 24.79,80.619 44.983,80.619 49.167,84.803 63.173,84.803 63.348,84.979 63.348,113.716 69.298,119.666 69.298,148.73 70.265,149.697 79.705,149.697 80.598,148.803 80.598,131.402 84.873,127.127 84.873,125.658 84.35,125.135 v1(83.684,125.135)
  BOT SIG w0.3: v1(83.684,125.135) 84.715,125.135 85.025,124.825 85.1,124.825 85.35,124.575 R50_PWR_PROT_3.2@85.35,124.5
NetR50_PWR_PROT_4_2: R50_PWR_PROT_4.2 U10.42 U12_PWR_PROT_4.6 | length 170.3
  TOP SIG w0.3: U10.42@16,47.575 16,49.221 19.894,53.115 19.894,68.016 23.305,71.427 23.305,79.701 24.624,81.02 44.816,81.02 49.001,85.205 62.771,85.205 62.947,85.381 62.947,113.883 68.897,119.833 68.897,148.897 70.098,150.098 79.902,150.098 81,149 81,144.5 84.873,140.627 84.873,139.658 84.35,139.135 v1(83.684,139.135)
  BOT SIG w0.3: v1(83.684,139.135) 83.722,139.097 85.253,139.097 R50_PWR_PROT_4.2@85.35,139
NetR50_PWR_PROT_5_2: R50_PWR_PROT_5.2 U10.43 U12_PWR_PROT_5.6 | length 166.5
  TOP SIG w0.3: U10.43@15.5,47.575 15.5,49.289 19.492,53.281 19.492,68.182 22.903,71.593 22.903,79.867 24.458,81.422 44.65,81.422 48.835,85.606 62.324,85.606 62.5,85.782 62.5,114.004 68.495,119.999 68.495,149.095 69.9,150.5 76.25,150.5 80.75,155 84.494,155 84.873,154.622 84.873,153.658 84.35,153.135 v1(83.684,153.135)
  BOT SIG w0.3: v1(83.684,153.135) 84.319,152.5 R50_PWR_PROT_5.2@85.35,152.5
NetR52_PWR_PROT_1_2: R52_PWR_PROT_1.2 U12_PWR_PROT_1.7 | length 4.2
  BOT SIG w0.3: v1(51.684,95.865) 51.134,96.415 51.134,97.363 51.521,97.75 53.1,97.75 R52_PWR_PROT_1.2@53.35,98
NetR52_PWR_PROT_2_2: R52_PWR_PROT_2.2 U12_PWR_PROT_2.7 | length 4.2
  BOT SIG w0.3: v1(83.684,109.865) 83.134,110.415 83.134,111.363 83.521,111.75 85.1,111.75 R52_PWR_PROT_2.2@85.35,112
NetR52_PWR_PROT_3_2: R52_PWR_PROT_3.2 U12_PWR_PROT_3.7 | length 4.3
  BOT SIG w0.3: v1(83.684,123.865) 83.134,123.315 83.134,122.367 84.001,121.5 R52_PWR_PROT_3.2@85.35,121.5
NetR52_PWR_PROT_4_2: R52_PWR_PROT_4.2 U12_PWR_PROT_4.7 | length 4.5
  BOT SIG w0.3: v1(83.684,137.865) 83.134,138.415 83.134,139.363 83.626,139.855 84.78,139.855 85.1,140.175 85.35,140.425 R52_PWR_PROT_4.2@85.35,140.5
NetR52_PWR_PROT_5_2: R52_PWR_PROT_5.2 U12_PWR_PROT_5.7 | length 2.4
  BOT SIG w0.3: R52_PWR_PROT_5.2@81.65,151 82.819,151 v1(83.684,151.865)
NetR53_1: R53.1 U16.3 | length 5.2
  TOP SIG w0.3: U16.3@38.184,41.865 38.849,41.865 39.373,41.341 39.373,39.098 38.35,38.075 R53.1@38.35,38
NetR63_2: R63.2 U7.7 | length 2
  BOT SIG w0.3: R63.2@86.65,96.5 87.781,96.5 v1(88.416,97.135)
NetR70_2: R70.2 U10.46 | length 138.2
  TOP SIG w0.3: U10.46@14,47.575 14,46.5 14.75,45.75 v1(16.5,45.75)
  PWR w0.3: v1(16.5,45.75) 17.082,45.168 18.132,45.168 21.797,48.833 21.797,81.533 61.063,120.798 70.148,120.798 v1(91.35,142)
NetR71_2: R71.2 U10.39 | length 135.8
  TOP SIG w0.3: v1(17.5,45.75) U10.39@17.5,47.575
  PWR w0.3: v1(17.5,45.75) 17.538,45.788 18.184,45.788 21.395,48.999 21.395,81.699 60.896,121.2 64.2,121.2 64.202,121.202 69.902,121.202 90.8,142.1 90.8,142.95 v1(91.35,143.5)
NetR87_1: R87.1 U14.13 | length 2.5
  TOP SIG w0.254: R87.1@11.15,83 11.15,82.925 12.075,82 U14.13@13.225,82
NetR87_2: R87.2 U10.47 | length 41.8
  TOP SIG w0.3: R87.2@9.85,83 9.85,82.925 8.75,81.825 8.75,74 18.25,64.5 18.25,53.75 13.5,49 U10.47@13.5,47.575
NetR88_2: R88.2 U10.51 U15.6 | length 88.9
  TOP SIG w0.3: v1(7.184,124.135) 7.149,124.1 4.8,124.1 1.5,120.8 1.5,52.468 7.768,46.2 8.9,46.2 9.1,46 U10.51@10.425,46
  BOT SIG w0.3: v1(7.184,124.135) 7.222,124.097 7.403,124.097 8,123.5 R88.2@8.85,123.5
NetR89_1: R89.1 U14.12 | length 4.5
  TOP SIG w0.254: R89.1@12,86 12,82.9 12.4,82.5 U14.12@13.225,82.5
NetR92_2: R92.2 R94.1 U14.18 | length 4.3
  TOP SIG w0.254: R92.2@14.65,78 14.65,76.425 14.925,76.15 R94.1@15,76.15 ; R92.2@14.65,78.075 15,78.425 U14.18@15,80.225
NetR93_1: R93.1 U14.15 | length 2.1
  TOP SIG w0.254: R93.1@11.15,81 U14.15@13.225,81
NetR101_IO_CHECKER_0_3: R101_IO_CHECKER_0.3
NetR107_2: R107.2 U10.45 U19.6 | length 99.6
  TOP SIG w0.3: U10.45@14.5,47.575 14.5,49.425 18.675,53.6 18.675,68.525 22.1,71.95 22.1,80.2 24.125,82.225 44.307,82.225 46.325,84.243 46.325,97.725 48.352,99.752 53.752,99.752 54.25,100.25 54.25,108.465 55.65,109.865 v1(56.316,109.865)
  BOT SIG w0.3: R107.2@54.65,110.5 54.65,110.575 55.76,111.685 56.544,111.685 56.866,111.363 56.866,110.415 v1(56.316,109.865)
NetR108_2: R108.2 U19.7 | length 2.8
  BOT SIG w0.3: R108.2@54.65,109 54.65,109.075 56.278,110.703 56.278,111.097 v1(56.316,111.135)
NetR111_2: R111.2 U15.7 | length 2.1
  BOT SIG w0.3: R111.2@5.4,123.5 5.4,123.425 5.65,123.175 5.725,123.175 6.035,122.865 v1(7.184,122.865)
NetR121_IO_CHECKER_0_1: R121_IO_CHECKER_0.1 U10.62 U17_IO_CHECKER_0.18 | length 55.8
  TOP SIG w0.2: U10.62@10.425,40.5 v1(12,40.5)
  TOP SIG w0.3: R121_IO_CHECKER_0.1@48.5,52.15 48.575,52.15 48.875,52.45 48.875,53.875 v1(49.736,54.736) 50.964,54.736 52.15,53.55 52.15,53.491 52.225,53.416 U17_IO_CHECKER_0.18@52.225,52.55
  BOT SIG w0.3: v1(12,40.5) 17.6,40.5 23.547,46.447 26.197,46.447 27.256,47.506 39.358,47.506 40.516,46.348 45.748,46.348 49.45,50.05 49.45,54.396 49.736,54.682 v1(49.736,54.736)
NetR121_IO_CHECKER_1_1: R121_IO_CHECKER_1.1 U10.88 U17_IO_CHECKER_1.18 | length 56.1
  TOP SIG w0.3: U10.88@18,32.425 18,31.568 19.403,30.165 19.403,27.837 19.408,27.832 19.408,27 19.408,26.07 19.408,25.07 19.408,24.075 21.573,21.91 22.569,21.91 23.569,21.91 24.498,21.91 51.158,21.91 52.603,23.355 52.603,28.823 52.262,29.164 52.262,30.013 52.188,30.087 52.188,30.936 51.772,31.352 49.852,31.352 48.751,30.251 48.751,29.9 48.501,29.65 R121_IO_CHECKER_1.1@48.5,29.65
NetR132_1: R132.1 U18.8 | length 4.6
  TOP SIG w0.3: R132.1@4.15,135 4.15,135.075 6.298,137.223 U18.8@7.78,137.223
NetR133_1: R133.1 U18.7 | length 4.2
  TOP SIG w0.3: R133.1@4.15,136.5 4.15,136.575 5.433,137.858 U18.7@7.78,137.858
NetU10_7: U10.7 U16.1 | length 20.4
  TOP SIG w0.2: U10.7@25.576,37 26.5,37 v1(27,36.5)
  BOT SIG w0.2: v1(27,36.5) 27.707,36.5 28.013,36.194 28.013,35.913 28.325,35.602 30.897,35.602 32.296,37 36.6,37 37.6,38 37.6,43.821 v1(38.184,44.405)
NetU10_17: U10.17 U18.21 | length 119.8
  TOP SIG w0.2: U10.17@25.576,42 v1(27.25,42)
  TOP SIG w0.3: v1(6,129) 6.016,128.984 7.764,128.984 U18.21@7.78,128.968
  PWR w0.3: v1(6,129) 4.8,129 1.6,125.8 1.6,51.4 6,47 6,43 10.1,38.9 22.15,38.9 26.35,43.1 27.15,43.1 27.5,42.75 27.5,42.304 27.25,42.054 v1(27.25,42)
NetU10_18: U10.18 U18.18 | length 119.4
  TOP SIG w0.2: U10.18@25.576,42.5 v1(26.75,42.5)
  TOP SIG w0.3: v1(6,130.788) 6.054,130.788 6.139,130.873 U18.18@7.78,130.873
  PWR w0.3: v1(6,130.788) 1.198,125.986 1.198,51.202 5.566,46.834 5.566,42.866 9.934,38.498 22.316,38.498 23.204,39.386 23.636,39.386 v1(26.75,42.5)
NetU10_54: U10.54 U18.19 | length 96.2
  TOP SIG w0.3: U18.19@7.78,130.238 5.238,130.238 4.7,129.7 2.3,129.7 1.098,128.498 1.098,52.302 8.45,44.95 9.078,44.95 9.484,44.544 10.381,44.544 U10.54@10.425,44.5
NetU10_55: U10.55 U13_ADC_0.1 | length 60.4
  TOP SIG w0.2: v1(9,44.25) 9.081,44.25 9.331,44 U10.55@10.425,44
  TOP SIG w0.3: U13_ADC_0.1@36.3,74.725 36.31,74.735 37.985,74.735 v1(38,74.75)
  BOT SIG w0.3: v1(9,44.25) 10.575,42.675 16.871,42.675 19.497,45.301 19.497,46.497 21.497,48.497 21.497,50.433 23.367,52.303 36.734,52.303 37.998,53.568 37.998,64.612 38,64.614 v1(38,74.75)
NetU10_57: U10.57 U20.1 | length 52.5
  TOP SIG w0.2: v1(9,42.75) 9.25,43 U10.57@10.425,43
  TOP SIG w0.3: U20.1@41.725,66.7 41.725,65.329 42,65.054 v1(42,65)
  BOT SIG w0.3: v1(9,42.75) 9.5,42.75 9.977,42.273 17.038,42.273 20.048,45.284 20.048,46.48 21.898,48.33 21.898,50.266 23.534,51.902 36.9,51.902 38.4,53.402 38.4,61.4 v1(42,65)
NetU10_58: U10.58 U13_ADC_1.1 | length 41.5
  TOP SIG w0.2: v1(9.25,42) 9.748,42.498 10.422,42.498 U10.58@10.425,42.5
  TOP SIG w0.3: U13_ADC_1.1@41.725,53.2 41.735,53.19 41.735,51.515 v1(41.75,51.5)
  BOT SIG w0.3: v1(9.25,42) 9.288,41.962 9.72,41.962 9.81,41.872 17.204,41.872 20.45,45.118 20.45,46.314 22.3,48.164 22.3,50.1 23.7,51.5 26.3,51.5 v1(41.75,51.5)
NetU10_60: U10.60 U17_IO_CHECKER_0.19 | length 58.3
  TOP SIG w0.2: v1(8.75,41.5) U10.60@10.425,41.5
  TOP SIG w0.3: v1(49.75,55.5) 50.774,55.5 52.875,53.399 U17_IO_CHECKER_0.19@52.875,52.55
  BOT SIG w0.3: v1(8.75,41.5) 8.712,41.462 8.712,41.24 8.7,41.228 8.7,40.772 9.022,40.45 11.172,40.45 11.791,41.069 17.569,41.069 23.348,46.848 26.03,46.848 27.09,47.908 39.524,47.908 40.682,46.75 45.582,46.75 49.048,50.216 49.048,54.826 49.722,55.5 v1(49.75,55.5)
NetU10_61: U10.61 U17_IO_CHECKER_0.20 | length 58
  TOP SIG w0.2: v1(9.25,41) U10.61@10.425,41
  TOP SIG w0.3: v1(49.75,56.25) 50.674,56.25 53.525,53.399 U17_IO_CHECKER_0.20@53.525,52.55
  BOT SIG w0.3: v1(9.25,41) 11.154,41 11.624,41.47 17.37,41.47 23.15,47.25 25.75,47.25 26.81,48.31 39.69,48.31 40.848,47.152 45.416,47.152 48.647,50.383 48.647,55.945 48.952,56.25 v1(49.75,56.25)
NetU10_90: U10.90 U17_IO_CHECKER_1.19 | length 51.3
  TOP SIG w0.3: U10.90@19,32.425 19,31.136 19.805,30.331 19.805,28.003 19.81,27.998 19.81,27.166 19.81,26.237 19.81,25.237 19.81,24.241 21.739,22.311 22.735,22.311 23.735,22.311 24.664,22.311 44.811,22.311 46.9,24.4 46.9,30.1 48.648,31.848 52.577,31.848 52.875,31.55 U17_IO_CHECKER_1.19@52.875,30.05
NetU10_91: U10.91 U17_IO_CHECKER_1.20 | length 51.5
  TOP SIG w0.3: U10.91@19.5,32.425 19.5,31.204 20.206,30.497 20.206,28.169 20.211,28.164 20.211,27.332 20.211,26.403 20.211,25.403 20.211,24.407 21.906,22.713 22.901,22.713 23.901,22.713 24.831,22.713 44.645,22.713 46.498,24.566 46.498,30.266 48.482,32.25 53,32.25 53.525,31.725 U17_IO_CHECKER_1.20@53.525,30.05
NetU12_PWR_PROT_1_1: U12_PWR_PROT_1.1 U12_PWR_PROT_1.2 XF2_PWR_PROT_1.3 XF2_PWR_PROT_1.4
NetU12_PWR_PROT_2_1: U12_PWR_PROT_2.1 U12_PWR_PROT_2.2 XF2_PWR_PROT_2.3 XF2_PWR_PROT_2.4
NetU12_PWR_PROT_3_1: U12_PWR_PROT_3.1 U12_PWR_PROT_3.2 XF2_PWR_PROT_3.3 XF2_PWR_PROT_3.4
NetU12_PWR_PROT_4_1: U12_PWR_PROT_4.1 U12_PWR_PROT_4.2 XF2_PWR_PROT_4.3 XF2_PWR_PROT_4.4
NetU12_PWR_PROT_5_1: U12_PWR_PROT_5.1 U12_PWR_PROT_5.2 XF2_PWR_PROT_5.3 XF2_PWR_PROT_5.4
NetU14_4: U14.4
NetU19_3: U19.3 U19.4 XF3.3 XF3.4
nINH_BYPASS_0: Q8_BYPASS_0.6 R55_BYPASS_0.2 | length 2
  TOP SIG w0.3: Q8_BYPASS_0.6@86.5,69.825 86.5,69.838 88.488,69.838 R55_BYPASS_0.2@88.5,69.85
nINH_BYPASS_1: Q8_BYPASS_1.6 R55_BYPASS_1.2 | length 2
  BOT SIG w0.3: Q8_BYPASS_1.6@86.5,67.675 86.5,67.663 88.488,67.663 R55_BYPASS_1.2@88.5,67.65
nINH_BYPASS_2: Q8_BYPASS_2.6 R55_BYPASS_2.2 | length 2
  TOP SIG w0.3: Q8_BYPASS_2.6@86.5,77.325 86.5,77.338 88.488,77.338 R55_BYPASS_2.2@88.5,77.35
nINH_BYPASS_3: Q8_BYPASS_3.6 R55_BYPASS_3.2 | length 2
  BOT SIG w0.3: Q8_BYPASS_3.6@86.5,75.175 86.5,75.163 88.488,75.163 R55_BYPASS_3.2@88.5,75.15
nPWR_FLT_LED: R46.1
OUT_0: F2_MOSFET_BANK_0.2 J1.11 Q7_BYPASS_0.5-6-7-8 R101_IO_CHECKER_0.2 | length 64.6
  TOP SIG w2: Q7_BYPASS_0.5-6-7-8@90.01,66.963 92.854,64.119 92.854,57.5 ; F2_MOSFET_BANK_0.2@90.333,57.5 92.854,57.5 ; J1.11@96.05,57 95.874,57 95.374,57.5 92.854,57.5
  GND w0.3: v1(57.6,46.689) 57.611,46.7 61.332,46.7 71.1,56.468 71.1,59.3 72.798,60.998 74.798,60.998 75.2,61.4 89.85,61.4 94.25,57 J1.11@96.05,57
OUT_1: F3_MOSFET_BANK_0.2 J1.12 Q7_BYPASS_1.5-6-7-8 R100_IO_CHECKER_0.3 | length 67.3
  GND w0.3: v1(54.9,46.7) 54.9,46.736 56.206,48.042 60.474,48.042 69.003,56.571 69.003,58.339 72.4,61.736 72.4,62.9 73,63.5 73.75,63.5 75.047,62.203 94.847,62.203 J1.12@96.05,61
  BOT SIG w2: Q7_BYPASS_1.5-6-7-8@90.01,70.538 91.578,70.538 92.75,69.366 92.75,62.5 ; F3_MOSFET_BANK_0.2@90.333,62.5 92.75,62.5 ; J1.12@96.05,61 94.55,62.5 92.75,62.5
OUT_2: F4_MOSFET_BANK_0.2 J1.9 Q7_BYPASS_2.5-6-7-8 R99_IO_CHECKER_1.2 | length 80.5
  TOP SIG w1: Q7_BYPASS_2.5-6-7-8@90.01,74.463 91.9,72.573 91.9,67.942 98,61.842 98,50.95 J1.9@96.05,49
  TOP SIG w2: F4_MOSFET_BANK_0.2@90.333,50.5 94.55,50.5 J1.9@96.05,49
  GND w0.3: v1(54.9,42.8) 57.408,45.308 68.244,45.308 73.034,50.098 93.602,50.098 94.451,49.249 95.801,49.249 J1.9@96.05,49
OUT_3: F5_MOSFET_BANK_0.2 J1.10 Q7_BYPASS_3.5-6-7-8 R99_IO_CHECKER_1.3 | length 81.9
  GND w0.3: v1(54.1,42.8) 57.009,45.71 68.078,45.71 72.868,50.5 93.55,50.5 J1.10@96.05,53
  BOT SIG w1: Q7_BYPASS_3.5-6-7-8@90.01,78.038 92,76.048 92,73.4 94.547,70.853 94.547,65.453 98,62 98,54.95 J1.10@96.05,53
  BOT SIG w2: F5_MOSFET_BANK_0.2@90.333,55.5 93.55,55.5 J1.10@95.926,53.125
OUT_4: F2_MOSFET_BANK_1.2 J1.7 R98_IO_CHECKER_1.4 | length 54.5
  TOP SIG w2: F2_MOSFET_BANK_1.2@90.333,41.5 95.374,41.5 95.874,41 J1.7@96.05,41
  GND w0.3: v1(56.808,42.761) 56.808,42.786 58.527,44.505 68.577,44.505 73.367,49.295 93.237,49.295 94.105,48.427 94.105,42.945 J1.7@96.05,41
OUT_5: F3_MOSFET_BANK_1.2 J1.8 R99_IO_CHECKER_1.1 | length 52.7
  GND w0.3: v1(55.7,42.8) 57.806,44.906 68.41,44.906 73.201,49.697 93.403,49.697 94.506,48.594 94.506,46.544 J1.8@96.05,45
  BOT SIG w2: F3_MOSFET_BANK_1.2@90.333,46.5 94.55,46.5 J1.8@96.05,45
OUT_6: F4_MOSFET_BANK_1.2 J1.5 R98_IO_CHECKER_1.2 | length 60
  TOP SIG w2: F4_MOSFET_BANK_1.2@90.333,34.5 94.55,34.5 J1.5@96.05,33
  GND w0.3: v1(58.4,42.8) 59.301,43.702 68.909,43.702 73.7,48.492 92.904,48.492 93.302,48.095 93.302,39.181 94.402,38.081 94.402,34.649 J1.5@96.05,33
OUT_7: F5_MOSFET_BANK_1.2 J1.6 R98_IO_CHECKER_1.3 | length 57.7
  GND w0.3: v1(57.6,42.8) 58.903,44.103 68.743,44.103 73.533,48.894 93.071,48.894 93.703,48.261 93.703,39.347 J1.6@96.05,37
  BOT SIG w2: F5_MOSFET_BANK_1.2@90.333,39.5 93.55,39.5 J1.6@95.926,37.125
OUT_8: F2_MOSFET_BANK_2.2 J1.3 R101_IO_CHECKER_1.3 | length 49.8
  TOP SIG w2: F2_MOSFET_BANK_2.2@90.333,25.5 95.374,25.5 95.874,25 J1.3@96.05,25
  GND w0.3: v1(58.4,24.2) 58,23.8 58,23 62.39,18.61 89.659,18.61 J1.3@96.05,25
OUT_9: F3_MOSFET_BANK_2.2 J1.4 R98_IO_CHECKER_1.1 | length 62.5
  GND w0.3: v1(59.2,42.8) 59.254,42.8 59.754,43.3 69.076,43.3 73.866,48.09 92.724,48.09 92.9,47.915 92.9,39 94,37.9 94,31.05 J1.4@96.045,29.005
  BOT SIG w2: F3_MOSFET_BANK_2.2@90.333,30.5 94.55,30.5 J1.4@96.05,29
OUT_10: F4_MOSFET_BANK_2.2 J1.1 R100_IO_CHECKER_1.3 | length 50.7
  TOP SIG w2: F4_MOSFET_BANK_2.2@90.333,18.5 94.55,18.5 J1.1@96.05,17
  GND w0.3: v1(54.9,24.2) 54.909,24.191 54.909,23.819 61.725,17.003 96.047,17.003 J1.1@96.05,17
OUT_11: F5_MOSFET_BANK_2.2 J1.2 R101_IO_CHECKER_1.1 | length 50.5
  GND w0.3: v1(56.8,24.2) 56.8,23.064 62.058,17.806 92.856,17.806 J1.2@96.05,21
  BOT SIG w2: F5_MOSFET_BANK_2.2@90.333,23.5 93.55,23.5 J1.2@95.926,21.125
OUT_12: F2_MOSFET_BANK_3.2 J1.13 R100_IO_CHECKER_1.2 | length 67.7
  TOP SIG w2: F2_MOSFET_BANK_3.2@90.333,9.5 90.349,9.516 93.516,9.516 100.05,16.05 J1.13@100.05,19
  GND w0.3: v1(54.1,24.2) 54.1,24.146 54.2,24.046 54.2,23.96 61.559,16.602 93.398,16.602 94.7,15.3 98.1,15.3 100.05,17.25 J1.13@100.05,19
OUT_13: F3_MOSFET_BANK_3.2 J1.24 R100_IO_CHECKER_1.1 | length 70.2
  GND w0.3: v1(53.3,24.2) 61.3,16.2 93.2,16.2 94.502,14.898 101.948,14.898 J1.24@104.05,17
  BOT SIG w2: F3_MOSFET_BANK_3.2@90.333,14.5 101.374,14.5 103.874,17 J1.24@104.05,17
OUT_14: F4_MOSFET_BANK_3.2 J1.26 R101_IO_CHECKER_1.2 | length 88.4
  TOP SIG w2: F4_MOSFET_BANK_3.2@90.333,2.5 90.35,2.516 93.328,2.516 94.5,3.688 94.5,5.366 96.634,7.5 102.5,7.5 107,12 107,22.05 J1.26@104.05,25
  GND w0.3: v1(57.6,24.2) 57.598,24.199 57.598,22.834 62.224,18.208 90.508,18.208 95.3,23 96.9,23 98.9,25 J1.26@104.05,25
OUT_15: F5_MOSFET_BANK_3.2 J1.25 R100_IO_CHECKER_1.4 | length 81.8
  GND w0.3: v1(55.7,24.2) 55.7,23.596 61.891,17.405 93.449,17.405 95.247,19.202 97.302,19.202 99.1,21 J1.25@104.05,21
  BOT SIG w2: F5_MOSFET_BANK_3.2@90.333,7.5 102.5,7.5 107,12 107,18.05 J1.25@104.05,21
PD_1_MOSFET_BANK_0: D41_MOSFET_BANK_0.1 R18_MOSFET_BANK_0.1 R22_MOSFET_BANK_0.1 U6_MOSFET_BANK_0.7 | length 39.5
  TOP SIG w0.2: v1(72.5,52.75) 73,53.25 73,54.25 72.202,55.049 72.202,63.981 72.419,64.199 86.9,64.199 ; D41_MOSFET_BANK_0.1@86.84,63.5 86.84,64.139 86.9,64.199 ; R18_MOSFET_BANK_0.1@88.15,60 R22_MOSFET_BANK_0.1@89.35,60 89.35,60.899 89.952,61.5 89.952,63.448 89.201,64.199 86.9,64.199
  BOT SIG w0.2: v1(72.5,52.75) 73.25,53.5 73.25,53.9 74.576,55.226 74.576,55.751 U6_MOSFET_BANK_0.7@74.625,55.8
PD_1_MOSFET_BANK_1: D41_MOSFET_BANK_1.1 R18_MOSFET_BANK_1.1 R22_MOSFET_BANK_1.1 U6_MOSFET_BANK_1.7 | length 42
  TOP SIG w0.2: v1(72.5,36.75) 73,37.25 73,38.25 72.202,39.049 72.202,47.981 72.419,48.199 88.253,48.199 89.952,46.5 89.952,45.5 89.35,44.899 R22_MOSFET_BANK_1.1@89.35,44.075 ; R18_MOSFET_BANK_1.1@88.15,44 R22_MOSFET_BANK_1.1@89.35,44 R22_MOSFET_BANK_1.1@89.35,44.075 ; D41_MOSFET_BANK_1.1@92.5,45.66 92.5,45.62 92.204,45.324 90.598,45.324 R22_MOSFET_BANK_1.1@89.35,44.075
  BOT SIG w0.2: v1(72.5,36.75) 73.25,37.5 73.25,37.9 74.576,39.226 74.576,39.751 U6_MOSFET_BANK_1.7@74.625,39.8
PD_1_MOSFET_BANK_2: D41_MOSFET_BANK_2.1 R18_MOSFET_BANK_2.1 R22_MOSFET_BANK_2.1 U6_MOSFET_BANK_2.7 | length 42
  TOP SIG w0.2: v1(72.5,20.75) 73,21.25 73,22.25 72.202,23.049 72.202,31.981 72.419,32.199 88.253,32.199 89.952,30.5 89.952,29.5 89.35,28.899 R22_MOSFET_BANK_2.1@89.35,28.35 ; R18_MOSFET_BANK_2.1@88.15,28 R22_MOSFET_BANK_2.1@89.35,28 R22_MOSFET_BANK_2.1@89.35,28.35 ; D41_MOSFET_BANK_2.1@92.5,29.66 91.411,29.66 91.075,29.324 90.324,29.324 89.595,28.595 89.595,28.375 89.57,28.35 R22_MOSFET_BANK_2.1@89.35,28.35
  BOT SIG w0.2: v1(72.5,20.75) 73.25,21.5 73.25,21.9 74.576,23.226 74.576,23.751 U6_MOSFET_BANK_2.7@74.625,23.8
PD_1_MOSFET_BANK_3: D41_MOSFET_BANK_3.1 R18_MOSFET_BANK_3.1 R22_MOSFET_BANK_3.1 U6_MOSFET_BANK_3.7 | length 42
  TOP SIG w0.2: v1(72.5,4.75) 73,5.25 73,6.25 72.202,7.049 72.202,15.981 72.419,16.199 88.253,16.199 89.952,14.5 89.952,13.5 89.35,12.899 R22_MOSFET_BANK_3.1@89.35,12.075 ; R18_MOSFET_BANK_3.1@88.15,12 R22_MOSFET_BANK_3.1@89.35,12 R22_MOSFET_BANK_3.1@89.35,12.075 ; D41_MOSFET_BANK_3.1@92.5,13.66 92.5,13.62 91.88,13 90.275,13 R22_MOSFET_BANK_3.1@89.35,12.075
  BOT SIG w0.2: v1(72.5,4.75) 73.25,5.5 73.25,5.9 74.576,7.226 74.576,7.751 U6_MOSFET_BANK_3.7@74.625,7.8
PD_2_MOSFET_BANK_0: D42_MOSFET_BANK_0.1 R19_MOSFET_BANK_0.1 R23_MOSFET_BANK_0.1 U6_MOSFET_BANK_0.9 | length 37.1
  BOT SIG w0.2: U6_MOSFET_BANK_0.9@75.275,50.2 75.275,50.725 75.802,51.252 75.802,63.302 76.218,63.718 88.322,63.718 88.44,63.6 88.44,61.634 89.35,60.724 R23_MOSFET_BANK_0.1@89.35,60 ; R19_MOSFET_BANK_0.1@88.15,60 R23_MOSFET_BANK_0.1@89.35,60 ; D42_MOSFET_BANK_0.1@92.5,58.34 92.5,58.3 91.524,57.324 90.225,57.324 89.952,57.597 89.952,59.118 89.63,59.44 89.63,59.72 R23_MOSFET_BANK_0.1@89.35,60
PD_2_MOSFET_BANK_1: D42_MOSFET_BANK_1.1 R19_MOSFET_BANK_1.1 R23_MOSFET_BANK_1.1 U6_MOSFET_BANK_1.9 | length 37.2
  BOT SIG w0.2: U6_MOSFET_BANK_1.9@75.275,34.2 75.275,34.725 75.802,35.252 75.802,47.375 76.144,47.718 88.322,47.718 88.44,47.6 88.44,45.634 89.35,44.724 R23_MOSFET_BANK_1.1@89.35,44 ; R19_MOSFET_BANK_1.1@88.15,44 R23_MOSFET_BANK_1.1@89.35,44 ; D42_MOSFET_BANK_1.1@92.5,42.34 92.5,42.3 91.524,41.324 90.225,41.324 89.952,41.597 89.952,43.118 89.63,43.44 89.63,43.72 R23_MOSFET_BANK_1.1@89.35,44